# Altium PCB BrauV2_PANEL.PcbDoc
Units mm, origin at the board's own origin, x right, y up, seen from the top; angles counter-clockwise.
Board outline 220 x 235 mm, 4 copper layers (Top Copper, Int1 Copper, Int2 Copper, Bottom Copper), stack 1.57 mm thick; 3 components, 0 nets, 125 pads, 0 vias.
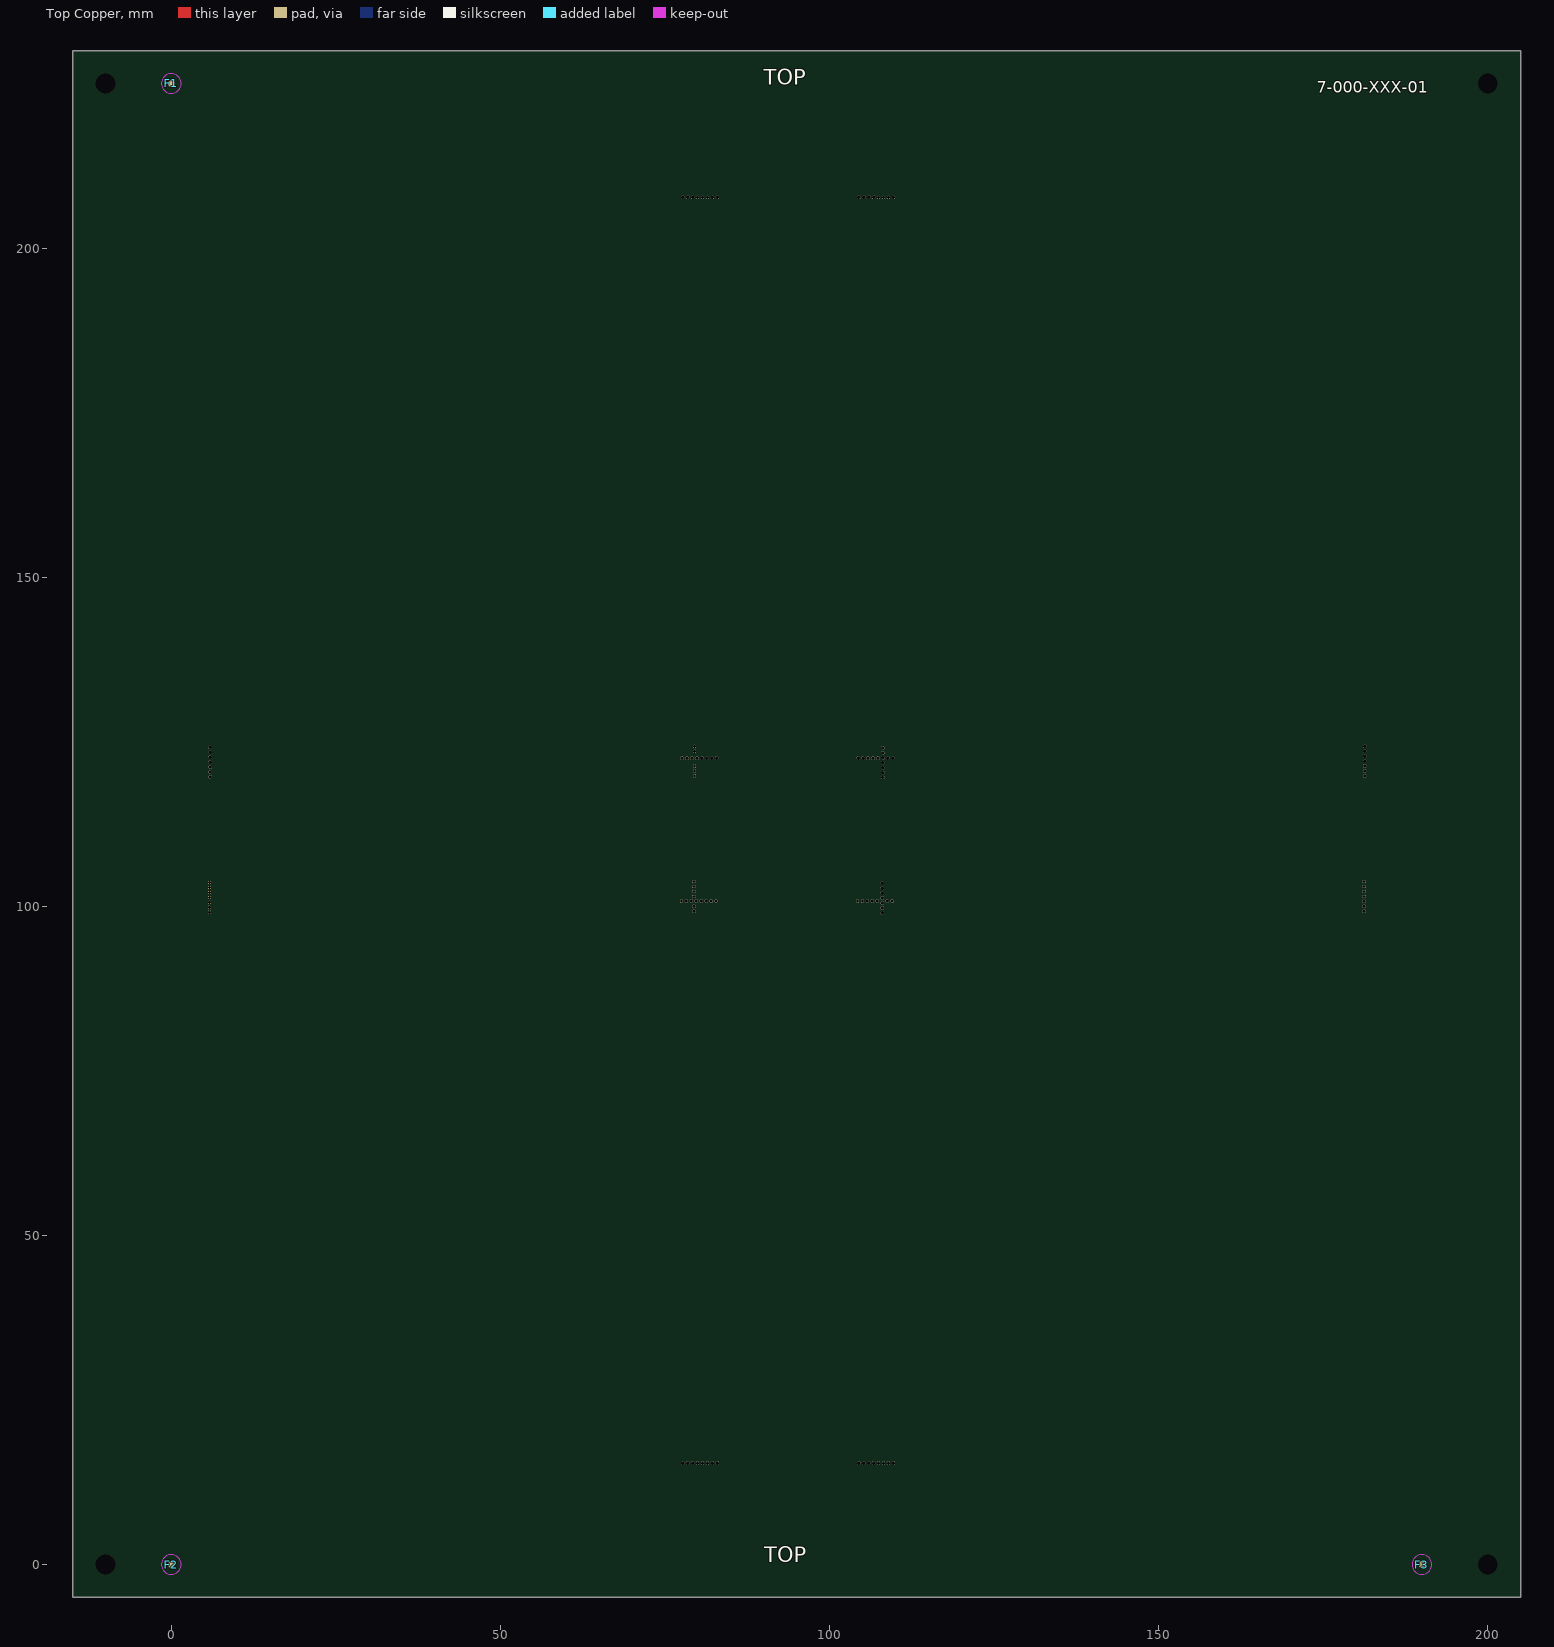
[diagram p0: Top Copper view]
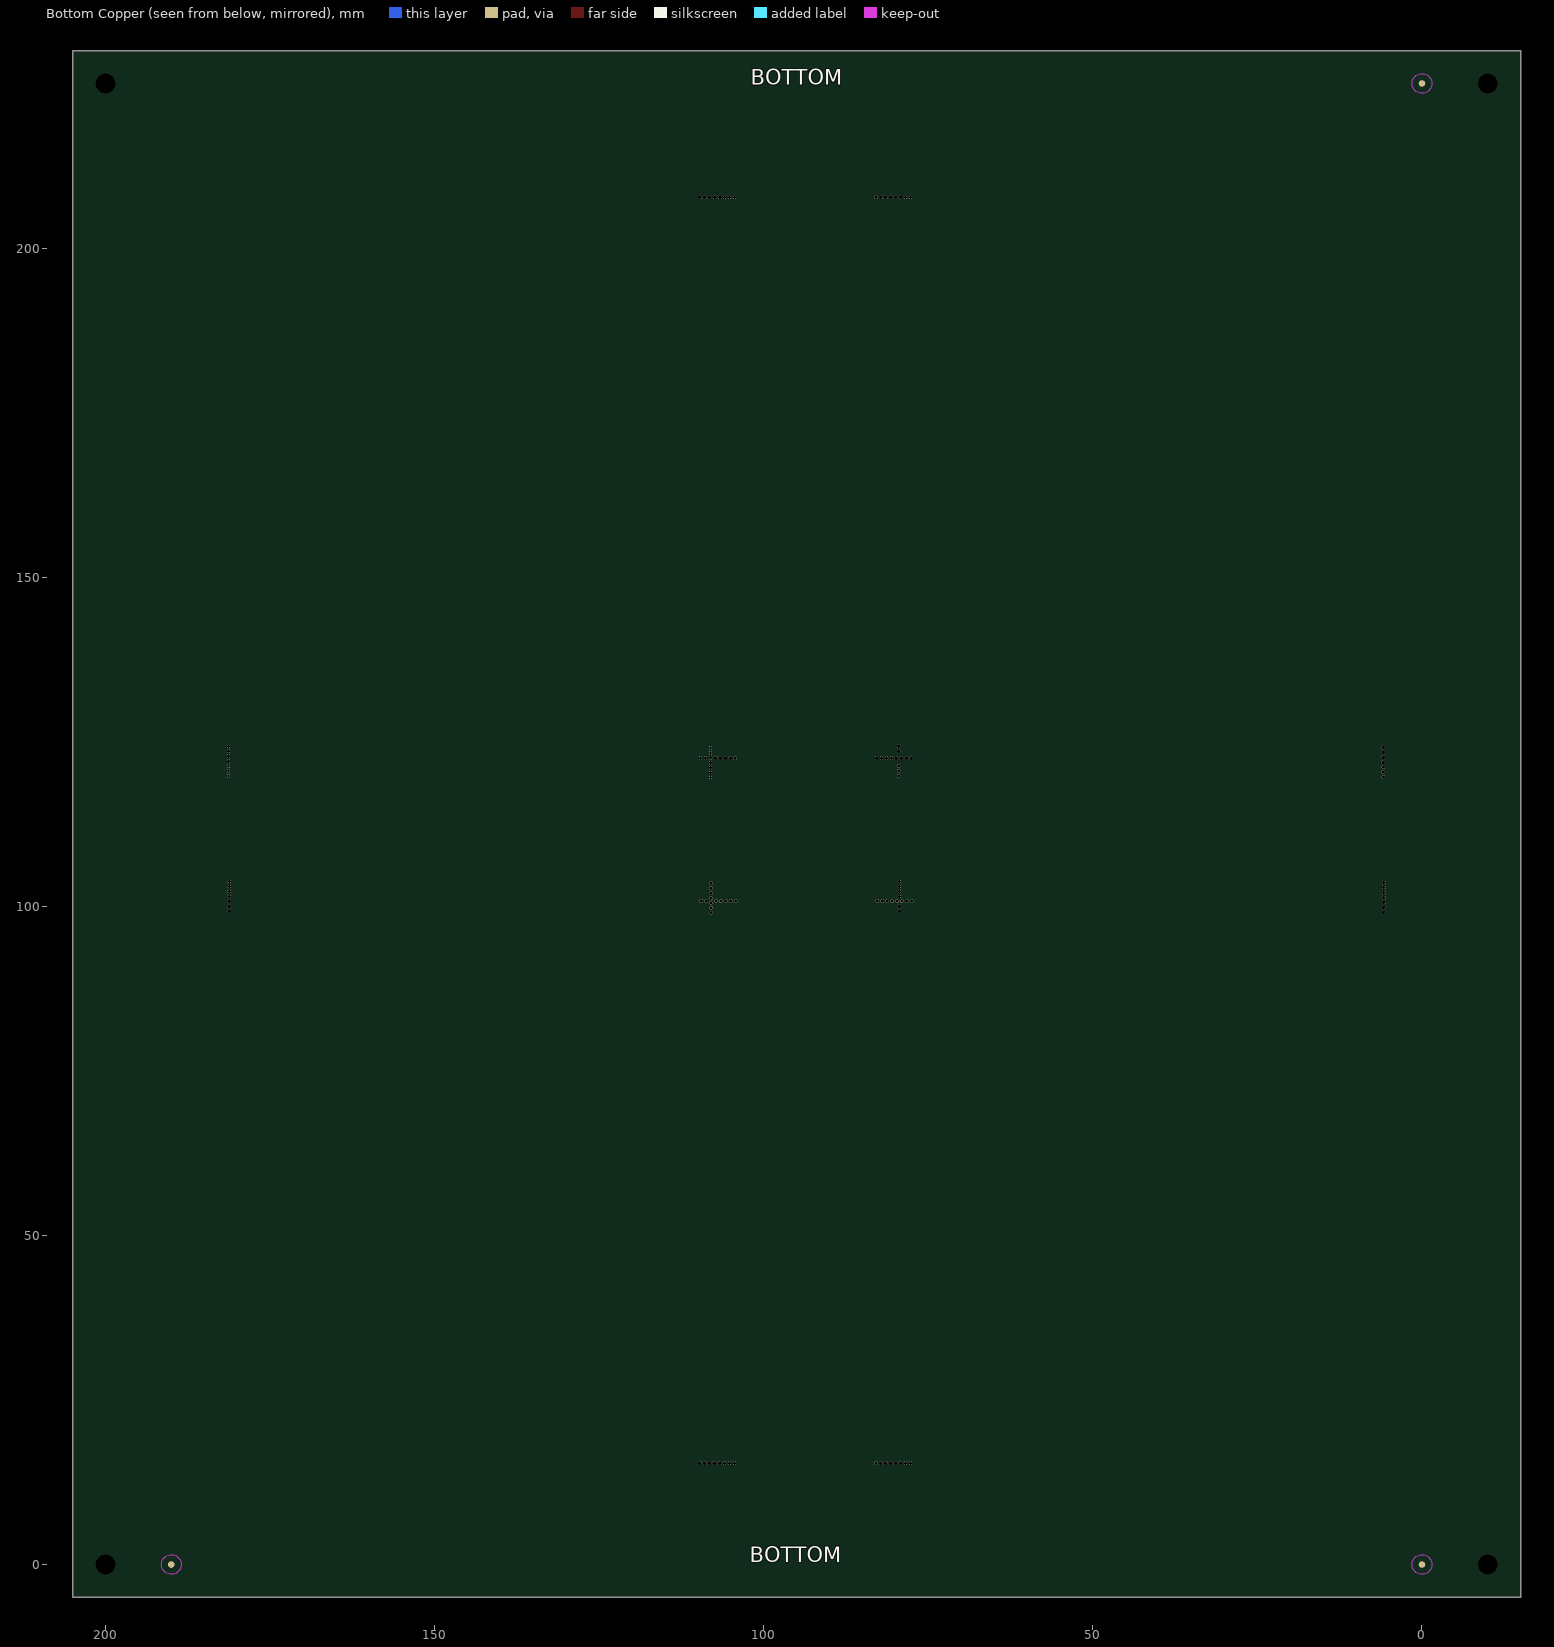
[diagram p1: Bottom Copper view, seen from below]

## Layer stack, top to bottom
Top Solder: solder mask 0.0127, SM-001, Dk 3.8
Top Copper: signal copper 0.035
Dielectric 2: prepreg 0.1, PP-2313, Dk 4.05
Int1 Copper: signal copper 0.0175
Dielectric 6: core 1.265, Core, Dk 4.3
Int2 Copper: signal copper 0.0175
Dielectric 7: prepreg 0.1, PP-2313, Dk 4.05
Bottom Copper: signal copper 0.035
Bottom Solder: solder mask 0.0127, SM-001, Dk 3.8

## Board outline
-15,-5 205,-5 205,230 -15,230

## Design rules (kind name [scope] priority, off if disabled: settings)
Clearance [All] p1: gap=0.254 ignorepadtopadclearanceinfootprint=FALSE except(0: Arc-Hole Track-Hole SMDPad-Hole THPad-Hole Via-Hole Fill-Hole Poly-Hole Region-Hole Text-Hole)
PolygonConnect [All] p1: connectstyle=Relief reliefconductorwidth=0.254 reliefentries=4 polygonreliefangle="90 Angle" airgapwidth=0.254
RoutingVias [All] p1: holewidth=0.711 width=1.27 viastyle="Through Hole" minholewidth=0.711 minwidth=1.27 maxholewidth=0.711 maxwidth=1.27
SolderMaskExpansion [All] p1: expansion=0.102 istentingtop=FALSE
Width [All] p1: maxlimit=0.254 minlimit=0.254 preferedwidth=0.254
30 further rules are at their usual default settings.

## Components (designator, comment, footprint, x,y, rotation, side; value= is the part's Value field where it differs from the comment)
F1 "Fiducial" Fiducial 0,225 r0 top
F2 "Fiducial" Fiducial 0,0 r0 top
F3 "Fiducial" Fiducial 190,0 r0 top

## Footprints (in the part's own frame and the unit in brackets; to place one, negate y for a bottom-side part, rotate by r counter-clockwise, add the part's x,y. Pads: shape width x height; smd on the part's side, far side on the other; paste and mask are expansions set on the pad)
Fiducial [mm]
  round 1 smd mask+0: 1(0,0)
  round 1 smd far side mask+0: 1(0,0)
  Top Copper pour cut-out: 1.5,0 1.386,0.574 1.061,1.061 0.574,1.386 0,1.5 0,1.5 -0.574,1.386 -1.061,1.061 -1.386,0.574 -1.5,0 -1.5,0 -1.386,-0.574 -1.061,-1.061 -0.574,-1.386 0,-1.5 0,-1.5 0.574,-1.386 1.061,-1.061 1.386,-0.574 1.5,0
  Top Copper keep-out circle w0.1: c0,0 r1.5
  Bottom Copper pour cut-out: 1.5,0 1.386,0.574 1.061,1.061 0.574,1.386 0,1.5 0,1.5 -0.574,1.386 -1.061,1.061 -1.386,0.574 -1.5,0 -1.5,0 -1.386,-0.574 -1.061,-1.061 -0.574,-1.386 0,-1.5 0,-1.5 0.574,-1.386 1.061,-1.061 1.386,-0.574 1.5,0
  Bottom Copper keep-out circle w0.1: c0,0 r1.5

## Part data
F1 F2: library part CMP-008-0007-A.1, Component Name=Fiducial
F3: library part JK-NSMD005, "60V 150mA 1.5s 1206 PTC Resettable Fuses RoHS", Component Name=Fiducial

## Free pads (board coordinates)
  round 1 hole 3 unplated: NC(-10,0) NC(-10,225) NC(200,0) NC(200,225)
  round 0.5 hole 0.5: NC(5.8,99.1) NC(5.8,99.85) NC(5.8,100.6) NC(5.8,101.35) NC(5.8,102.1) NC(5.8,102.85) NC(5.8,103.6) NC(5.9,119.65) NC(5.9,120.4) NC(5.9,121.15) NC(5.9,121.9) NC(5.9,122.65) NC(5.9,123.4) NC(5.9,124.15) NC(77.5,100.8) NC(77.6,122.5) NC(77.7,15.4) NC(77.7,207.7) NC(78.25,100.8) NC(78.35,122.5) NC(78.45,15.4) NC(78.45,207.7) NC(79,100.8) NC(79.1,122.5) NC(79.2,15.4) NC(79.2,207.7) NC(79.4,99.25) NC(79.4,100) NC(79.4,101.5) NC(79.4,102.25) NC(79.4,103) NC(79.4,103.75) NC(79.5,119.8) NC(79.5,120.55) NC(79.5,121.3) NC(79.5,123.55) NC(79.5,124.3) NC(79.75,100.8) NC(79.85,122.5) NC(79.95,15.4) NC(79.95,207.7) NC(80.5,100.8) NC(80.6,122.5) NC(80.7,15.4) NC(80.7,207.7) NC(81.25,100.8) NC(81.35,122.5) NC(81.45,15.4) NC(81.45,207.7) NC(82,100.8) NC(82.1,122.5) NC(82.2,15.4) NC(82.2,207.7) NC(82.75,100.8) NC(82.85,122.5) NC(82.95,15.4) NC(82.95,207.7) NC(104.25,100.8) NC(104.35,122.5) NC(104.45,15.4) NC(104.45,207.7) NC(105,100.8) NC(105.1,122.5) NC(105.2,15.4) NC(105.2,207.7) NC(105.75,100.8) NC(105.85,122.5) NC(105.95,15.4) NC(105.95,207.7) NC(106.5,100.8) NC(106.6,122.5) NC(106.7,15.4) NC(106.7,207.7) NC(107.25,100.8) NC(107.35,122.5) NC(107.45,15.4) NC(107.45,207.7) NC(108,99) NC(108,99.75) NC(108,100.5) NC(108,101.25) NC(108,102) NC(108,102.75) NC(108,103.5) NC(108.1,119.55) NC(108.1,120.3) NC(108.1,121.05) NC(108.1,121.8) NC(108.1,122.55) NC(108.1,123.3) NC(108.1,124.05) NC(108.2,15.4) NC(108.2,207.7) NC(108.75,100.8) NC(108.85,122.5) NC(108.95,15.4) NC(108.95,207.7) NC(109.5,100.8) NC(109.6,122.5) NC(109.7,15.4) NC(109.7,207.7) NC(181.2,99.25) NC(181.2,100) NC(181.2,100.75) NC(181.2,101.5) NC(181.2,102.25) NC(181.2,103) NC(181.2,103.75) NC(181.3,119.8) NC(181.3,120.55) NC(181.3,121.3) NC(181.3,122.05) NC(181.3,122.8) NC(181.3,123.55) NC(181.3,124.3)

## Nets (pads, with @x,y where several pads share a name; then routed paths per layer and width w, separated by ;. In a path a pad name is that pad's centre, name@x,y a point inside that pad or via, vN(x,y) a via of type N, cw(c..) or ccw(c..) an arc to the next point about the centre after c; other vN are vias at no path point)
pads on no net: F1.1 F2.1 F3.1

## Silkscreen, mask and mechanical layers (free items; w line width, h text height)
Top Overlay:
  text "TOP" at 90,224 h4
  text "7-000-XXX-01" at 174,223 h3
  text "TOP" at 90.1,-0.5 h4
Bottom Overlay:
  text "BOTTOM" at 102,224 h4
  text "BOTTOM" at 102.1,-0.5 h4
M2 (Fab Notes):
  drawing of 347 lines, arcs and shapes, not listed
  text "Layer" at 214.314,106.294 h1.52
  text "Name" at 224.726,106.294 h1.52
  text "Material" at 258.498,106.294 h1.52
  text "Thickness" at 272.719,106.294 h1.52
  text "Constant" at 289.225,106.294 h1.52
  text "Board Layer Stack" at 303.699,106.294 h1.52
  text "Top Overlay" at 224.726,103.246 h1.52
  text "Top Solder" at 224.726,100.198 h1.52
  text "SM-001" at 258.498,100.198 h1.52
  text "0.013mm" at 272.719,100.198 h1.52
  text "3.8" at 289.225,100.198 h1.52
  text "Top Surface Finish" at 224.726,97.15 h1.52
  text "PbSn" at 258.498,97.15 h1.52
  text "0.020mm" at 272.719,97.15 h1.52
  text "1" at 214.314,94.102 h1.52
  text "Top Copper" at 224.726,94.102 h1.52
  text "CF-004" at 258.498,94.102 h1.52
  text "0.035mm" at 272.719,94.102 h1.52
  text "Dielectric 2" at 224.726,91.054 h1.52
  text "PP-2313" at 258.498,91.054 h1.52
  text "0.100mm" at 272.719,91.054 h1.52
  text "4.05" at 289.225,91.054 h1.52
  text "2" at 214.314,88.006 h1.52
  text "Int1 Copper" at 224.726,88.006 h1.52
  text "CF-004" at 258.498,88.006 h1.52
  text "0.018mm" at 272.719,88.006 h1.52
  text "Dielectric 6" at 224.726,84.958 h1.52
  text "Core" at 258.498,84.958 h1.52
  text "1.265mm" at 272.719,84.958 h1.52
  text "4.3" at 289.225,84.958 h1.52
  text "3" at 214.314,81.91 h1.52
  text "Int2 Copper" at 224.726,81.91 h1.52
  text "CF-004" at 258.498,81.91 h1.52
  text "0.018mm" at 272.719,81.91 h1.52
  text "Dielectric 7" at 224.726,78.862 h1.52
  text "PP-2313" at 258.498,78.862 h1.52
  text "0.100mm" at 272.719,78.862 h1.52
  text "4.05" at 289.225,78.862 h1.52
  text "4" at 214.314,75.814 h1.52
  text "Bottom Copper" at 224.726,75.814 h1.52
  text "CF-004" at 258.498,75.814 h1.52
  text "0.035mm" at 272.719,75.814 h1.52
  text "Bottom Surface Finish" at 224.726,72.766 h1.52
  text "PbSn" at 258.498,72.766 h1.52
  text "0.020mm" at 272.719,72.766 h1.52
  text "Bottom Solder" at 224.726,69.718 h1.52
  text "SM-001" at 258.498,69.718 h1.52
  text "0.013mm" at 272.719,69.718 h1.52
  text "3.8" at 289.225,69.718 h1.52
  text "Bottom Overlay" at 224.726,66.67 h1.52
  text "Total board thickness:" at 214.314,63.622 h1.52
  text "1.635mm" at 272.719,63.622 h1.52
  text "MECHANICAL LAYER GUIDE / 1. MECHANICAL-30: PANEL OUTLINE / 2. MECHANICAL-5: ROUTE TOOL PATH / 3. MECHANICAL-2: NOTES" at 212.4,42.6 h4
  text "FABRICATION NOTES / 1. MANUFACTURE TO IPC6012B / 2. 2-LAYER FR-4 (STANDARD TG), 1.6MM / 3. CLEARANCE: 5 THOU / 4. 35um COPPER TOP AND BOTTOM / 5. FINISH: ELECTROLESS NICKEL/IMMERSION GOLD (ENIG) / 6. SOLDER RESIST: GREEN, BOTH SIDES / 7. SILKSCREEN: NON-CONDUCTIVE WHITE EPOXY/INK / 8. ELECTRICAL TEST REQUIRED / 9. PRODUCTION GERBERS TO BE SUPPLIED AND APPROVED BY DEFENDTEX PRIOR TO MANUFACTURE" at 212.8,-1.9 h4
M4 (General Notes):
  lines w0.1: 5,15 185,15 185,208 5,208 5,15
Route Tool Path:
  lines w2: 6.6,104.6 6.6,118.5 ; 78.7,104.9 78.7,118.8 ; 83.9,100.1 103.1,100.1 ; 84,123.2 103.2,123.2 ; 84.1,16.1 103.3,16.1 ; 84.1,207 103.3,207 ; 108.8,104.5 108.8,118.4 ; 180.5,104.9 180.5,118.8
Drill Drawing:
  circle w0.254: c214.853,113.933 r0.847
  lines w0.254: 214.007,116.897 215.7,116.897 215.7,118.59 214.007,118.59 214.007,116.897
  lines w0.381: 212.488,111.944 461.593,111.944 ; 212.488,119.564 461.593,119.564 ; 226.48,108.134 226.48,123.374 ; 241.208,108.134 241.208,123.374 ; 269.648,108.134 269.648,123.374 ; 282.497,108.134 282.497,123.374 ; 301.136,108.134 301.136,123.374 ; 342.271,108.134 342.271,123.374 ; 357.254,108.134 357.254,123.374 ; 376.197,108.134 376.197,123.374 ; 392.703,108.134 392.703,123.374 ; 426.576,108.134 426.576,123.374 ; 212.488,108.134 461.593,108.134 461.593,123.374 212.488,123.374 212.488,108.134
  text "Symbol" at 214.774,120.707 h1.83
  text "Count" at 227.623,120.707 h1.83
  text "Hole Size" at 242.351,120.707 h1.83
  text "Plated" at 270.791,120.707 h1.83
  text "Hole Type" at 283.64,120.707 h1.83
  text "Drill Layer Pair" at 302.279,120.707 h1.83
  text "Via/Pad" at 343.414,120.707 h1.83
  text "Pad Shape" at 358.397,120.707 h1.83
  text "Template" at 377.34,120.707 h1.83
  text "Hole Tolerance (+)" at 393.846,120.707 h1.83
  text "Hole Tolerance (-)" at 427.719,120.707 h1.83
  text "4" at 227.623,116.897 h1.52
  text "3.000mm (118.11mil)" at 242.351,116.897 h1.52
  text "NPTH" at 270.791,116.897 h1.52
  text "Round" at 283.64,116.897 h1.52
  text "Top Copper - Bottom Copper" at 302.279,116.897 h1.52
  text "Pad" at 343.414,116.897 h1.52
  text "Rounded" at 358.397,116.897 h1.52
  text "c100hn300" at 377.34,116.897 h1.52
  text "115" at 227.623,113.087 h1.52
  text "0.500mm (19.69mil)" at 242.351,113.087 h1.52
  text "PTH" at 270.791,113.087 h1.52
  text "Round" at 283.64,113.087 h1.52
  text "Top Copper - Bottom Copper" at 302.279,113.087 h1.52
  text "Pad" at 343.414,113.087 h1.52
  text "Rounded" at 358.397,113.087 h1.52
  text "c50h50" at 377.34,113.087 h1.52
  text "119 Total" at 227.623,109.277 h1.52
M30 (Panel Outline) (Mech30):
  the board outline again, w0.1

## Dimensions
-15,230 to 5,208 on M4 (General Notes)
5,15 to -15,-5 on M4 (General Notes)
205,-5 to 185,208 on M4 (General Notes)
5,15 to -15,-5 on M4 (General Notes)
-15,-5 to 205,-5 on M2 (Fab Notes)
-15,-5 to -15,230 on M2 (Fab Notes)

## Panel: embedded boards
"7-000-482-01.PcbDoc" at -2.5,26.3, 2 rows x 2 columns, spacing 107 x 102, rotation 0